# Altium PCB PCB1.PcbDoc (part 1 of 3)
Units mm, origin at the board's own origin, x right, y up, seen from the top; angles counter-clockwise.
Board outline 85 x 53 mm, 2 copper layers (Top Layer, Bottom Layer); 9 components, 0 nets, 22 pads, 70 vias.
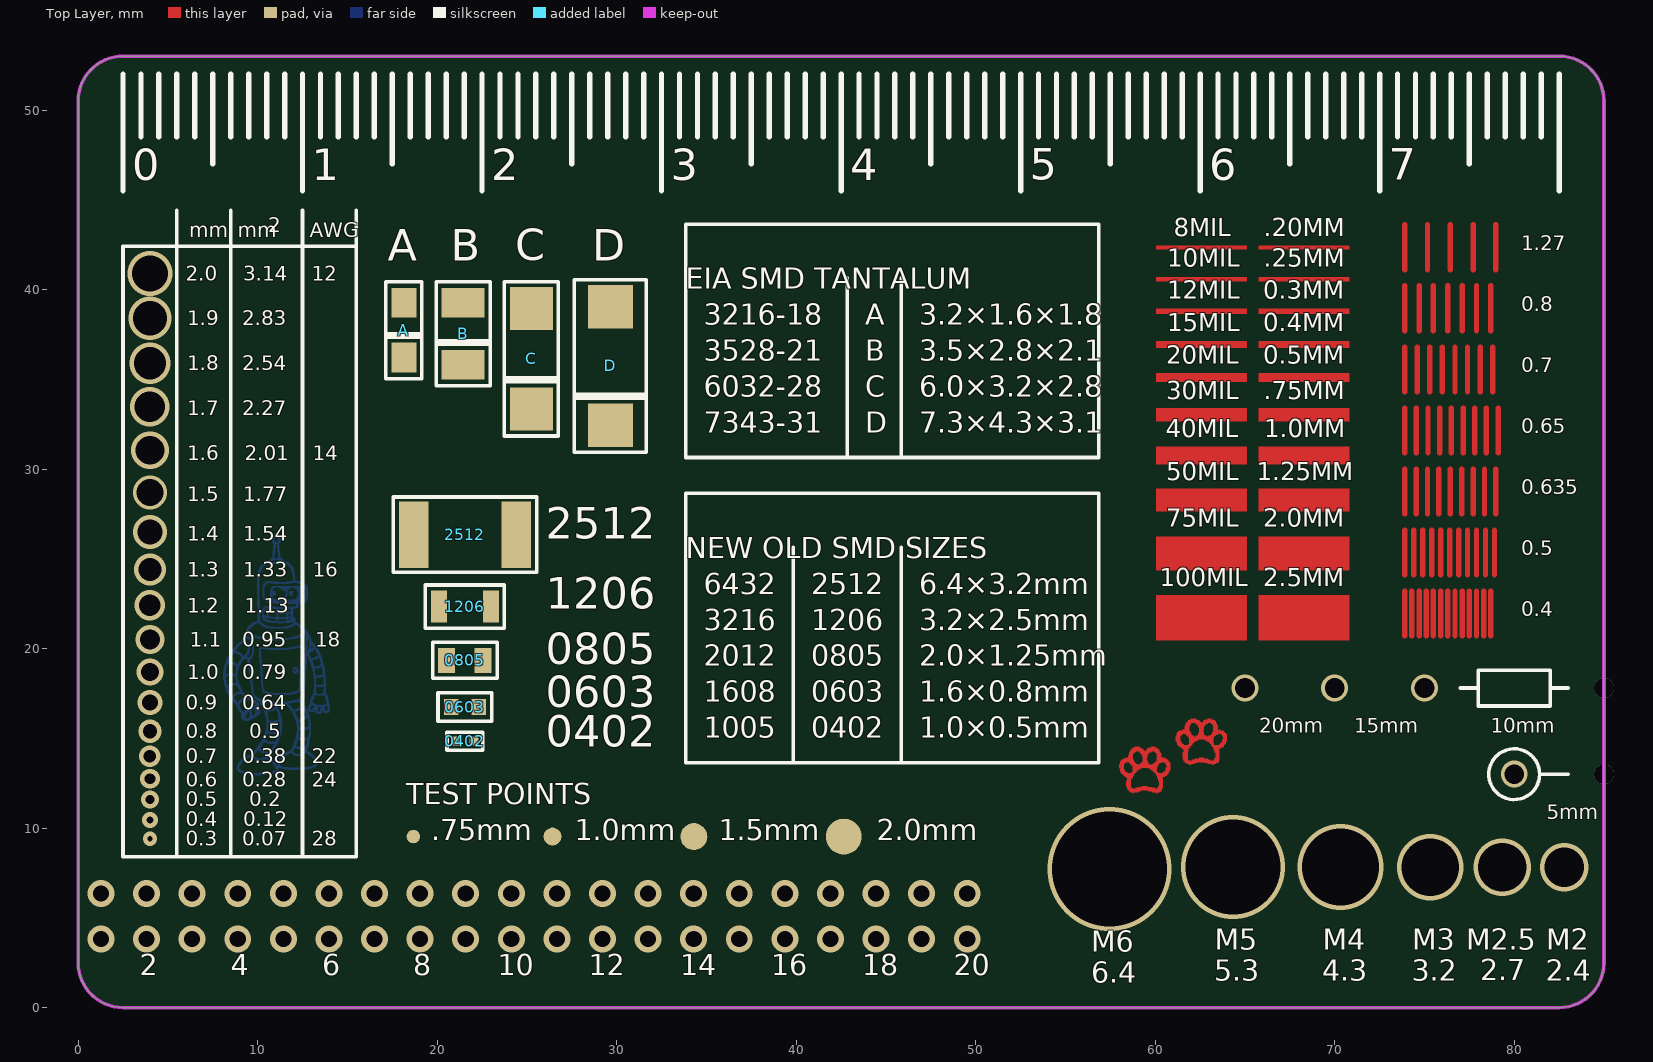
[diagram p0: Top Layer view]
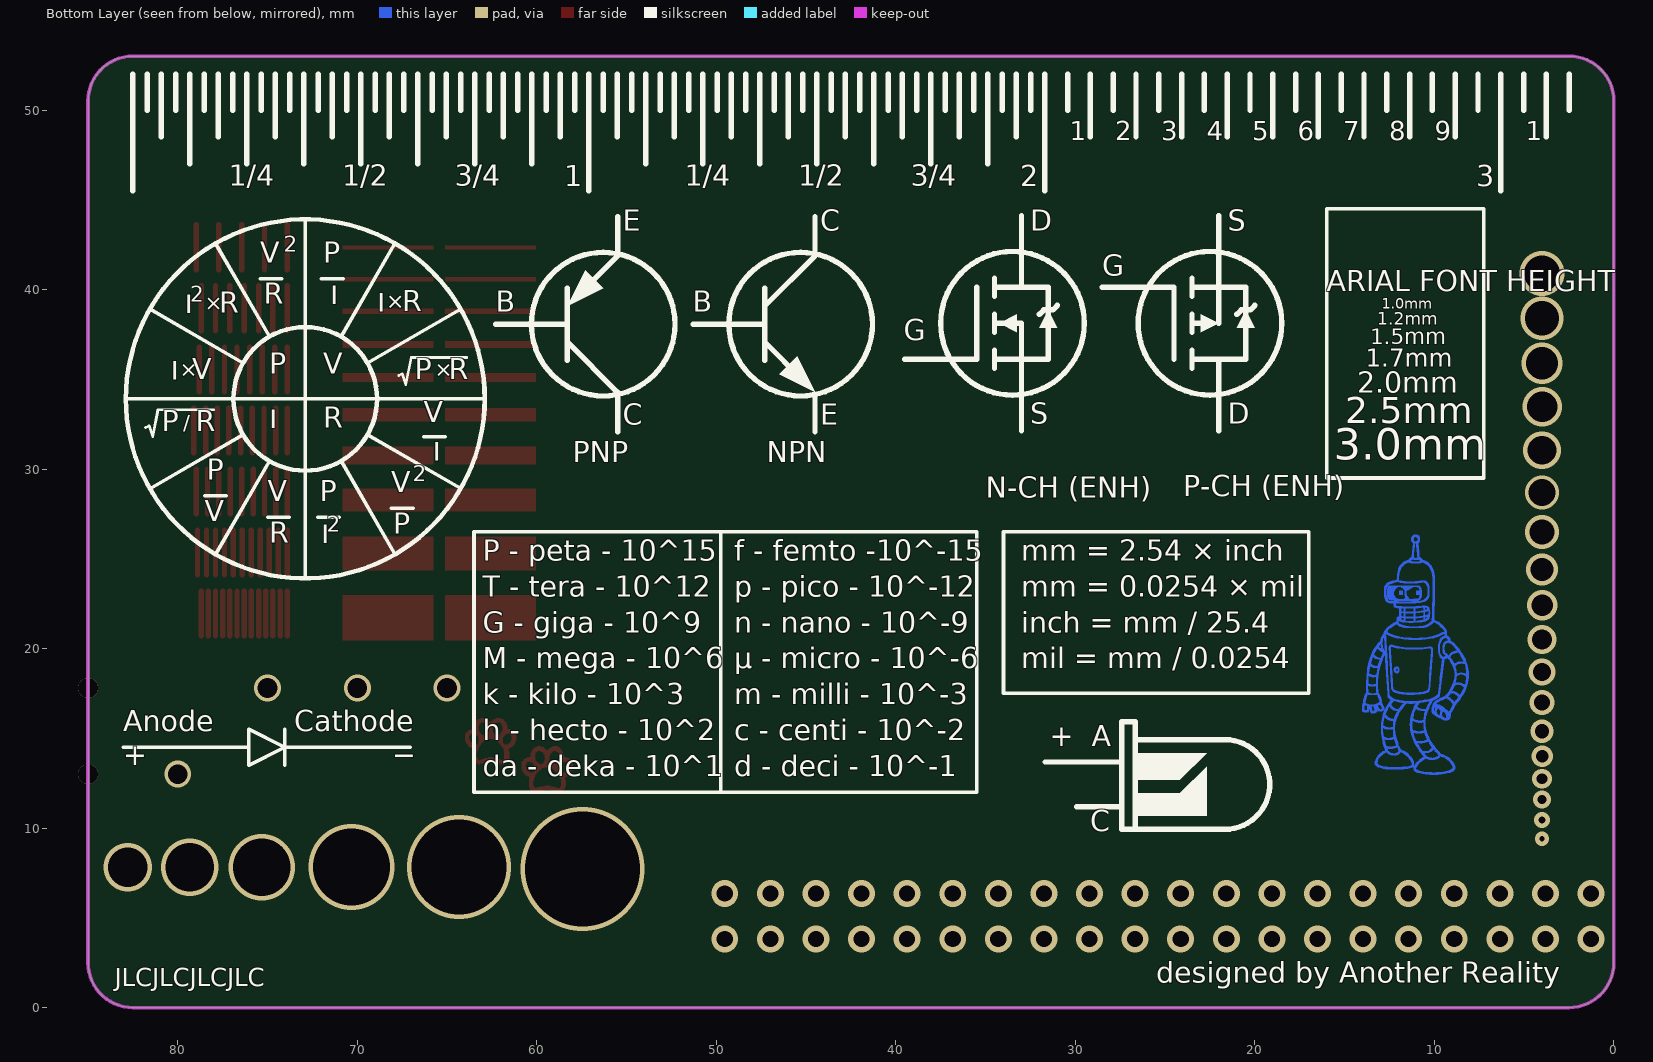
[diagram p1: Bottom Layer view, seen from below]

## Layer stack, top to bottom
Top Solder: solder mask 0.0102, Solder Resist, Dk 3.5
Top Layer: signal copper 0.0356
Dielectric 1: dielectric 0.32, FR-4, Dk 4.8
Bottom Layer: signal copper 0.0356
Bottom Solder: solder mask 0.0102, Solder Resist, Dk 3.5

## Board outline
0,2.5 0,50.5 cw(c2.5,50.5) 2.5,53 82.5,53 cw(c82.5,50.5) 85,50.5 85,2.5 cw(c82.5,2.5) 82.5,0 2.5,0 cw(c2.5,2.5)

## Design rules (kind name [scope] priority, off if disabled: settings)
Clearance [All] p1: gap=0.1 ignorepadtopadclearanceinfootprint=FALSE
MinimumSolderMaskSliver [All] p1: minsoldermaskwidth=0.01
PolygonConnect [All] p1: connectstyle=Relief reliefconductorwidth=0.254 reliefentries=4 polygonreliefangle="90 Angle" airgapwidth=0.254
RoutingVias [All] p1: holewidth=0.127 width=1.27 viastyle="Through Hole" minholewidth=0.025 minwidth=1.27 maxholewidth=1.27 maxwidth=1.27
SilkToSilkClearance [All] p1: silktosilkclearance=0.01
SilkToSolderMaskClearance [IsPad] p1: minsilkscreentomaskgap=0.01 clearancetoexposedcopper=TRUE
SolderMaskExpansion [All] p1: expansion=0.102
Width [All] p1: maxlimit=1.27 minlimit=0.01 preferedwidth=0.254
27 further rules are at their usual default settings.

## Components (designator, comment, footprint, x,y, rotation, side; value= is the part's Value field where it differs from the comment)
0402 "000" R0402 21.546,14.84 r0 top value=0R0 (schematic designator R1)
0603 "000" "R0603 5%" 21.546,16.74 r0 top value=0R0 (schematic designator R2)
0805 "000" R0805 21.546,19.34 r0 top value=0R0 (schematic designator R3)
1206 "111" "Resistor 1206" 21.546,22.34 r0 top value=K11 (schematic designator R4)
2512 "24m9" R2512 21.546,26.34 r0 top (schematic designator R5)
A "J476" "Case A" 18.146,37.74 r90 top value="47uF 6.3V" (schematic designator C1)
B "A476" "Case B" 21.446,37.54 r90 top value="47uF 10V" (schematic designator C2)
C "22 35V" "Case C" 25.246,36.14 r90 top value="22uF 35V" (schematic designator C3)
D "22 35V" "Case D" 29.646,35.74 r90 top value="22uF 35V" (schematic designator C4)

## Footprints (in the part's own frame and the unit in brackets; to place one, negate y for a bottom-side part, rotate by r counter-clockwise, add the part's x,y. Pads: shape width x height; smd on the part's side, far side on the other; paste and mask are expansions set on the pad)
"Case A" [mm]
  rect 1.65x1.4 smd: 1(-1.525,0) 2(1.525,0)
  silkscreen extent -2.7,-1 2.7,1
"Case B" [mm]
  rect 1.65x2.4 smd: 1(-1.725,0) 2(1.725,0)
  silkscreen extent -2.9,-1.5 2.9,1.5
"Case C" [mm]
  rect 2.4x2.4 smd: 1(-2.8,0) 2(2.8,0)
  silkscreen extent -4.3,-1.5 4.3,1.5
"Case D" [mm]
  rect 2.4x2.5 smd: 1(-3.3,0) 2(3.3,0)
  silkscreen extent -4.8,-2 4.8,2
R0402 [mm]
  rect 0.5x0.5 smd mask+0.076: 1(-0.5,0) 2(0.5,0)
  silkscreen extent -1,-0.5 1,0.5
"R0603 5%" [mm]
  rect 0.8x0.9 smd: 1(-0.762,0) 2(0.762,0)
  silkscreen extent -1.5,-0.8 1.5,0.8
R0805 [mil]
  rect 37.4x55.1 smd: 1(-40,0) 2(40,0)
  silkscreen extent -71,-39 71,39
R2512 [mm]
  rect 1.65x3.68 smd: 1(-2.86,0) 2(2.86,0)
  silkscreen extent -4,-2.1 4,2.1
"Resistor 1206" [mm]
  rect 0.9x1.8 smd: 1(-1.45,0) 2(1.45,0)
  silkscreen extent -2.2,-1.2 2.2,1.2

## Part data
0402: library part CMP-00180-5, "R 0R0", Package=0402, Component Name="Fixed resistor, SMD, 0402, 0R0 5%", Marking=000
0603: library part CMP-00039-5, "R 0R0", Package=0603, Component Name="Fixed resistor, SMD, 0603, 0R0", Marking=000
0805: library part CMP-00086-4, "R 0R0", Package=0805, Component Name="Fixed resistor, SMD, 0805, 0R0 5%", Marking=000
1206: library part CMP-00483-5, "R K11", Package=1206, Component Name="Fixed resistor, SMD, 1206, K11 5%", Marking=111
2512: library part CMP-00550-5, "R 24m9", Package=2512, Component Name="Fixed resistor, SMD, 2512, 24m9 1%", Marking=24m9
A: library part CMP-00155-5, "C 47uF x 6.3V", Package="Case A", Component Name="Tantalum Capacitor, SMD, Case A, 47uF 6.3V", Marking=J476
B: library part CMP-00081-4, "C 47uF x 10V", Package="Case B", Component Name="Tantalum Capacitor, SMD, Case B, 47uF 10V", Marking=A476
C: library part CMP-00312-5, "C 22uF x 35V", Package="Case C", Component Name="Tantalum Capacitor, SMD, Case C, 22uF 35V", Marking="22 35V"
D: library part CMP-00160-4, "C 22uF x 35V", Package="Case D", Component Name="Tantalum Capacitor, SMD, Case D, 22uF 35V", Marking="22 35V"

## Free pads (board coordinates)
  round 0.75 smd: 1(18.675,9.525)
  round 1 smd: 2(26.425,9.525)
  round 1.5 smd: 3(34.3,9.525)
  round 2 smd: 3(42.65,9.525)

## Via types
v1: diameter 1.5, hole 0.9, Top Layer to Bottom Layer, 40 vias
v2: diameter 1.5, hole 1.1, Top Layer to Bottom Layer, 4 vias
v3: diameter 1.1, hole 1.1, Top Layer to Bottom Layer, 2 vias
v4: diameter 2.7, hole 2.2, Top Layer to Bottom Layer, 1 vias
v5: diameter 5.8, hole 5.3, Top Layer to Bottom Layer, 1 vias
v6: diameter 4.8, hole 4.3, Top Layer to Bottom Layer, 1 vias
v7: diameter 3.7, hole 3.2, Top Layer to Bottom Layer, 1 vias
v8: diameter 3.2, hole 2.7, Top Layer to Bottom Layer, 1 vias
v9: diameter 0.8, hole 0.3, Top Layer to Bottom Layer, 1 vias
v10: diameter 0.9, hole 0.4, Top Layer to Bottom Layer, 1 vias
v11: diameter 1, hole 0.5, Top Layer to Bottom Layer, 1 vias
v12: diameter 1.1, hole 0.6, Top Layer to Bottom Layer, 1 vias
v13: diameter 1.2, hole 0.7, Top Layer to Bottom Layer, 1 vias
v14: diameter 1.3, hole 0.8, Top Layer to Bottom Layer, 1 vias
v15: diameter 1.4, hole 0.9, Top Layer to Bottom Layer, 1 vias
v16: diameter 1.5, hole 1, Top Layer to Bottom Layer, 1 vias
v17: diameter 1.6, hole 1.1, Top Layer to Bottom Layer, 1 vias
v18: diameter 1.7, hole 1.2, Top Layer to Bottom Layer, 1 vias
v19: diameter 1.8, hole 1.3, Top Layer to Bottom Layer, 1 vias
v20: diameter 1.9, hole 1.4, Top Layer to Bottom Layer, 1 vias
v21: diameter 1.9, hole 1.5, Top Layer to Bottom Layer, 1 vias
v22: diameter 2.1, hole 1.6, Top Layer to Bottom Layer, 1 vias
v23: diameter 2.2, hole 1.7, Top Layer to Bottom Layer, 1 vias
v24: diameter 2.3, hole 1.8, Top Layer to Bottom Layer, 1 vias
v25: diameter 2.5, hole 2, Top Layer to Bottom Layer, 1 vias
v26: diameter 2.4, hole 1.9, Top Layer to Bottom Layer, 1 vias
v27: diameter 6.9, hole 6.4, Top Layer to Bottom Layer, 1 vias

## Nets (pads, with @x,y where several pads share a name; then routed paths per layer and width w, separated by ;. In a path a pad name is that pad's centre, name@x,y a point inside that pad or via, vN(x,y) a via of type N, cw(c..) or ccw(c..) an arc to the next point about the centre after c; other vN are vias at no path point)
pads on no net: 0402.1 0402.2 0603.1 0603.2 0805.1 0805.2 1206.1 1206.2 2512.1 2512.2 A.1 A.2 B.1 B.2 C.1 C.2 D.1 D.2
copper on no net: | length 755.2
  Top Layer w0.051: 57.99,13.349 58.244,13.349 ; 57.99,13.4 58.244,13.4 ; 57.99,13.451 58.244,13.451 ; 57.99,13.502 58.244,13.502 ; 57.99,13.553 58.244,13.553 ; 58.04,13.197 58.345,13.197 ; 58.04,13.248 58.294,13.248 ; 58.04,13.299 58.244,13.299 ; 58.04,13.603 58.294,13.603 ; 58.04,13.654 58.345,13.654 ; 58.04,13.705 58.853,13.705 ; 58.091,13.095 58.447,13.095 ; 58.091,13.146 58.345,13.146 ; 58.091,13.756 58.802,13.756 ; 58.142,13.045 58.853,13.045 ; 58.142,13.807 58.802,13.807 ; 58.193,12.994 58.802,12.994 ; 58.193,13.857 58.752,13.857 ; 58.244,12.943 58.802,12.943 ; 58.294,12.892 58.752,12.892 ; 58.345,13.908 58.752,13.908 ; 58.396,12.333 58.65,12.333 ; 58.396,12.384 58.65,12.384 ; 58.396,12.435 58.65,12.435 ; 58.396,12.486 58.65,12.486 ; 58.396,12.537 58.65,12.537 ; 58.396,12.587 58.65,12.587 ; 58.396,12.638 58.65,12.638 ; 58.396,12.841 58.752,12.841 ; 58.447,12.181 60.377,12.181 ; 58.447,12.232 58.701,12.232 ; 58.447,12.283 58.701,12.283 ; 58.447,12.689 58.65,12.689 ; 58.447,12.74 58.701,12.74 ; 58.447,12.791 58.701,12.791 ; 58.498,12.13 60.377,12.13 ; 58.498,13.959 58.752,13.959 ; 58.498,14.01 58.752,14.01 ; 58.498,14.061 58.752,14.061 ; 58.548,12.079 59.209,12.079 ; 58.548,13.654 58.853,13.654 ; 58.548,14.111 58.752,14.111 ; 58.548,14.162 58.802,14.162 ; 58.548,14.213 58.802,14.213 ; 58.599,12.029 59.056,12.029 ; 58.599,13.603 58.904,13.603 ; 58.599,14.264 58.904,14.264 ; 58.599,14.315 59.412,14.315 ; 58.65,13.553 59.056,13.553 ; 58.65,14.365 59.361,14.365 ; 58.701,13.095 58.904,13.095 ; 58.701,13.502 60.174,13.502 ; 58.701,14.416 59.31,14.416 ; 58.752,11.978 58.802,11.978 ; 58.752,13.146 58.955,13.146 ; 58.752,13.197 59.006,13.197 ; 58.752,13.248 59.056,13.248 ; 58.752,13.299 59.158,13.299 ; 58.752,13.349 59.26,13.349 ; 58.752,13.4 60.123,13.4 ; 58.752,13.451 60.123,13.451 ; 58.752,14.467 59.209,14.467 ; 58.853,14.518 59.107,14.518 ; 58.904,12.232 59.971,12.232 ; 59.056,12.283 59.768,12.283 ; 59.107,13.553 59.717,13.553 ; 59.107,14.264 59.768,14.264 ; 59.158,14.213 59.666,14.213 ; 59.209,13.603 59.615,13.603 ; 59.209,14.162 59.615,14.162 ; 59.26,12.333 59.564,12.333 ; 59.26,13.654 59.615,13.654 ; 59.26,14.061 59.564,14.061 ; 59.26,14.111 59.615,14.111 ; 59.31,13.705 59.564,13.705 ; 59.31,13.756 59.564,13.756 ; 59.31,13.807 59.564,13.807 ; 59.31,13.857 59.514,13.857 ; 59.31,13.908 59.564,13.908 ; 59.31,13.959 59.564,13.959 ; 59.31,14.01 59.564,14.01 ; 59.463,14.315 60.225,14.315 ; 59.514,14.365 60.225,14.365 ; 59.564,14.416 60.174,14.416 ; 59.615,12.079 60.326,12.079 ; 59.615,13.349 60.072,13.349 ; 59.615,14.467 60.072,14.467 ; 59.717,13.299 60.072,13.299 ; 59.768,13.248 60.072,13.248 ; 59.768,14.518 59.971,14.518 ; 59.818,12.029 60.276,12.029 ; 59.818,13.553 60.174,13.553 ; 59.869,13.197 60.072,13.197 ; 59.92,13.146 60.123,13.146 ; 59.92,13.603 60.225,13.603 ; 59.971,13.095 60.174,13.095 ; 59.971,13.654 60.326,13.654 ; 59.971,14.264 60.276,14.264 ; 60.022,11.978 60.123,11.978 ; 60.022,12.994 60.682,12.994 ; 60.022,13.045 60.733,13.045 ; 60.022,13.705 60.784,13.705 ; 60.022,14.213 60.276,14.213 ; 60.072,12.943 60.631,12.943 ; 60.072,13.756 60.733,13.756 ; 60.072,13.807 60.733,13.807 ; 60.072,13.857 60.631,13.857 ; 60.072,13.908 60.53,13.908 ; 60.072,14.061 60.326,14.061 ; 60.072,14.111 60.326,14.111 ; 60.072,14.162 60.326,14.162 ; 60.123,12.232 60.428,12.232 ; 60.123,12.791 60.377,12.791 ; 60.123,12.841 60.428,12.841 ; 60.123,12.892 60.53,12.892 ; 60.123,13.959 60.326,13.959 ; 60.123,14.01 60.326,14.01 ; 60.174,12.283 60.428,12.283 ; 60.174,12.333 60.428,12.333 ; 60.174,12.638 60.428,12.638 ; 60.174,12.689 60.428,12.689 ; 60.174,12.74 60.428,12.74 ; 60.225,12.384 60.428,12.384 ; 60.225,12.435 60.428,12.435 ; 60.225,12.486 60.428,12.486 ; 60.225,12.537 60.428,12.537 ; 60.225,12.587 60.428,12.587 ; 60.428,13.095 60.733,13.095 ; 60.479,13.146 60.784,13.146 ; 60.53,13.197 60.784,13.197 ; 60.53,13.654 60.834,13.654 ; 60.58,13.248 60.834,13.248 ; 60.58,13.299 60.834,13.299 ; 60.58,13.349 60.834,13.349 ; 60.58,13.553 60.834,13.553 ; 60.58,13.603 60.834,13.603 ; 60.631,13.4 60.834,13.4 ; 60.631,13.451 60.834,13.451 ; 60.631,13.502 60.834,13.502 ; 61.139,14.873 61.393,14.873 ; 61.139,14.924 61.393,14.924 ; 61.139,14.975 61.393,14.975 ; 61.139,15.026 61.393,15.026 ; 61.139,15.077 61.393,15.077 ; 61.139,15.127 61.393,15.127 ; 61.19,14.772 61.444,14.772 ; 61.19,14.823 61.444,14.823 ; 61.19,15.178 61.444,15.178 ; 61.19,15.229 61.495,15.229 ; 61.19,15.28 62.003,15.28 ; 61.241,14.67 61.596,14.67 ; 61.241,14.721 61.495,14.721 ; 61.241,15.331 61.952,15.331 ; 61.292,14.619 62.003,14.619 ; 61.292,15.381 61.952,15.381 ; 61.342,14.569 61.952,14.569 ; 61.342,15.432 61.901,15.432 ; 61.393,14.518 61.952,14.518 ; 61.444,14.467 61.901,14.467 ; 61.495,15.483 61.901,15.483 ; 61.546,13.857 61.8,13.857 ; 61.546,13.908 61.8,13.908 ; 61.546,13.959 61.8,13.959 ; 61.546,14.01 61.8,14.01 ; 61.546,14.061 61.8,14.061 ; 61.546,14.111 61.8,14.111 ; 61.546,14.162 61.8,14.162 ; 61.546,14.213 61.8,14.213 ; 61.546,14.416 61.85,14.416 ; 61.596,13.756 63.527,13.756 ; 61.596,13.807 61.85,13.807 ; 61.596,14.264 61.8,14.264 ; 61.596,14.315 61.85,14.315 ; 61.596,14.365 61.85,14.365 ; 61.647,13.705 63.527,13.705 ; 61.647,15.534 61.901,15.534 ; 61.647,15.585 61.901,15.585 ; 61.647,15.635 61.901,15.635 ; 61.647,15.686 61.901,15.686 ; 61.698,13.654 62.358,13.654 ; 61.698,15.229 62.003,15.229 ; 61.698,15.737 61.952,15.737 ; 61.698,15.788 61.952,15.788 ; 61.698,15.839 62.003,15.839 ; 61.749,13.603 62.206,13.603 ; 61.749,15.178 62.054,15.178 ; 61.749,15.889 62.562,15.889 ; 61.8,15.127 62.155,15.127 ; 61.8,15.94 62.511,15.94 ; 61.85,14.67 62.054,14.67 ; 61.85,15.077 63.273,15.077 ; 61.85,15.991 62.46,15.991 ; 61.901,13.553 62.003,13.553 ; 61.901,14.721 62.104,14.721 ; 61.901,14.772 62.155,14.772 ; 61.901,14.823 62.206,14.823 ; 61.901,14.873 62.308,14.873 ; 61.901,14.924 62.409,14.924 ; 61.901,14.975 63.222,14.975 ; 61.901,15.026 63.273,15.026 ; 61.901,16.042 62.358,16.042 ; 62.003,16.093 62.257,16.093 ; 62.054,13.807 63.07,13.807 ; 62.206,13.857 62.917,13.857 ; 62.257,15.127 62.866,15.127 ; 62.257,15.839 62.917,15.839 ; 62.308,15.788 62.816,15.788 ; 62.358,15.178 62.765,15.178 ; 62.358,15.737 62.765,15.737 ; 62.409,15.229 62.714,15.229 ; 62.409,15.28 62.714,15.28 ; 62.409,15.635 62.714,15.635 ; 62.409,15.686 62.765,15.686 ; 62.46,13.908 62.714,13.908 ; 62.46,15.331 62.714,15.331 ; 62.46,15.381 62.663,15.381 ; 62.46,15.432 62.663,15.432 ; 62.46,15.483 62.663,15.483 ; 62.46,15.534 62.714,15.534 ; 62.46,15.585 62.714,15.585 ; 62.612,15.889 63.374,15.889 ; 62.663,15.94 63.374,15.94 ; 62.714,15.991 63.324,15.991 ; 62.765,13.654 63.476,13.654 ; 62.765,14.924 63.222,14.924 ; 62.765,16.042 63.222,16.042 ; 62.866,14.873 63.222,14.873 ; 62.917,13.603 63.374,13.603 ; 62.917,14.823 63.222,14.823 ; 62.917,16.093 63.12,16.093 ; 62.968,15.127 63.324,15.127 ; 63.019,14.772 63.222,14.772 ; 63.07,14.721 63.273,14.721 ; 63.07,15.178 63.374,15.178 ; 63.12,14.619 63.832,14.619 ; 63.12,14.67 63.273,14.67 ; 63.12,15.229 63.476,15.229 ; 63.12,15.839 63.425,15.839 ; 63.171,13.553 63.273,13.553 ; 63.171,14.569 63.832,14.569 ; 63.171,15.28 63.933,15.28 ; 63.171,15.331 63.882,15.331 ; 63.171,15.788 63.425,15.788 ; 63.222,14.467 63.679,14.467 ; 63.222,14.518 63.781,14.518 ; 63.222,15.381 63.832,15.381 ; 63.222,15.432 63.781,15.432 ; 63.222,15.483 63.476,15.483 ; 63.222,15.534 63.476,15.534 ; 63.222,15.635 63.476,15.635 ; 63.222,15.686 63.476,15.686 ; 63.222,15.737 63.476,15.737 ; 63.273,13.807 63.578,13.807 ; 63.273,14.365 63.527,14.365 ; 63.273,14.416 63.578,14.416 ; 63.273,15.585 63.476,15.585 ; 63.324,13.857 63.578,13.857 ; 63.324,13.908 63.578,13.908 ; 63.324,14.213 63.578,14.213 ; 63.324,14.264 63.578,14.264 ; 63.324,14.315 63.578,14.315 ; 63.374,13.959 63.578,13.959 ; 63.374,14.01 63.578,14.01 ; 63.374,14.061 63.578,14.061 ; 63.374,14.111 63.578,14.111 ; 63.374,14.162 63.578,14.162 ; 63.527,15.483 63.628,15.483 ; 63.578,14.67 63.882,14.67 ; 63.628,14.721 63.933,14.721 ; 63.679,14.772 63.933,14.772 ; 63.679,15.229 63.984,15.229 ; 63.73,14.823 63.984,14.823 ; 63.73,14.873 63.984,14.873 ; 63.73,14.924 63.984,14.924 ; 63.73,15.127 63.984,15.127 ; 63.73,15.178 63.984,15.178 ; 63.781,14.975 63.984,14.975 ; 63.781,15.026 63.984,15.026 ; 63.781,15.077 63.984,15.077
  Top Layer w0.3: 73.9,20.7 73.9,23.2 ; 73.9,24.1 73.9,26.6 ; 73.9,27.5 73.9,30 ; 73.9,30.9 73.9,33.4 ; 73.9,34.3 73.9,36.8 ; 73.9,37.7 73.9,40.2 ; 73.9,41.1 73.9,43.6 ; 74.3,20.7 74.3,23.2 ; 74.4,24.1 74.4,26.6 ; 74.535,27.5 74.535,30 ; 74.55,30.9 74.55,33.4 ; 74.6,34.3 74.6,36.8 ; 74.7,20.7 74.7,23.2 ; 74.7,37.7 74.7,40.2 ; 74.9,24.1 74.9,26.6 ; 75.1,20.7 75.1,23.2 ; 75.17,27.5 75.17,30 ; 75.17,41.1 75.17,43.6 ; 75.2,30.9 75.2,33.4 ; 75.3,34.3 75.3,36.8 ; 75.4,24.1 75.4,26.6 ; 75.5,20.7 75.5,23.2 ; 75.5,37.7 75.5,40.2 ; 75.805,27.5 75.805,30 ; 75.85,30.9 75.85,33.4 ; 75.9,20.7 75.9,23.2 ; 75.9,24.1 75.9,26.6 ; 76,34.3 76,36.8 ; 76.3,20.7 76.3,23.2 ; 76.3,37.7 76.3,40.2 ; 76.4,24.1 76.4,26.6 ; 76.44,27.5 76.44,30 ; 76.44,41.1 76.44,43.6 ; 76.5,30.9 76.5,33.4 ; 76.7,20.7 76.7,23.2 ; 76.7,34.3 76.7,36.8 ; 76.9,24.1 76.9,26.6 ; 77.075,27.5 77.075,30 ; 77.1,20.7 77.1,23.2 ; 77.1,37.7 77.1,40.2 ; 77.15,30.9 77.15,33.4 ; 77.4,24.1 77.4,26.6 ; 77.4,34.3 77.4,36.8 ; 77.5,20.7 77.5,23.2 ; 77.71,27.5 77.71,30 ; 77.71,41.1 77.71,43.6 ; 77.8,30.9 77.8,33.4 ; 77.9,20.7 77.9,23.2 ; 77.9,24.1 77.9,26.6 ; 77.9,37.7 77.9,40.2 ; 78.1,34.3 78.1,36.8 ; 78.3,20.7 78.3,23.2 ; 78.345,27.5 78.345,30 ; 78.4,24.1 78.4,26.6 ; 78.45,30.9 78.45,33.4 ; 78.7,20.7 78.7,23.2 ; 78.7,37.7 78.7,40.2 ; 78.8,34.3 78.8,36.8 ; 78.9,24.1 78.9,26.6 ; 78.98,27.5 78.98,30 ; 78.98,41.1 78.98,43.6 ; 79.1,30.9 79.1,33.4